# Altium PCB Power Board.PcbDoc
Units mm, origin at the board's own origin, x right, y up, seen from the top; angles counter-clockwise.
Board outline 84 x 73 mm, 2 copper layers (Top Layer, Bottom Layer); 21 components, 10 nets, 48 pads, 0 vias.
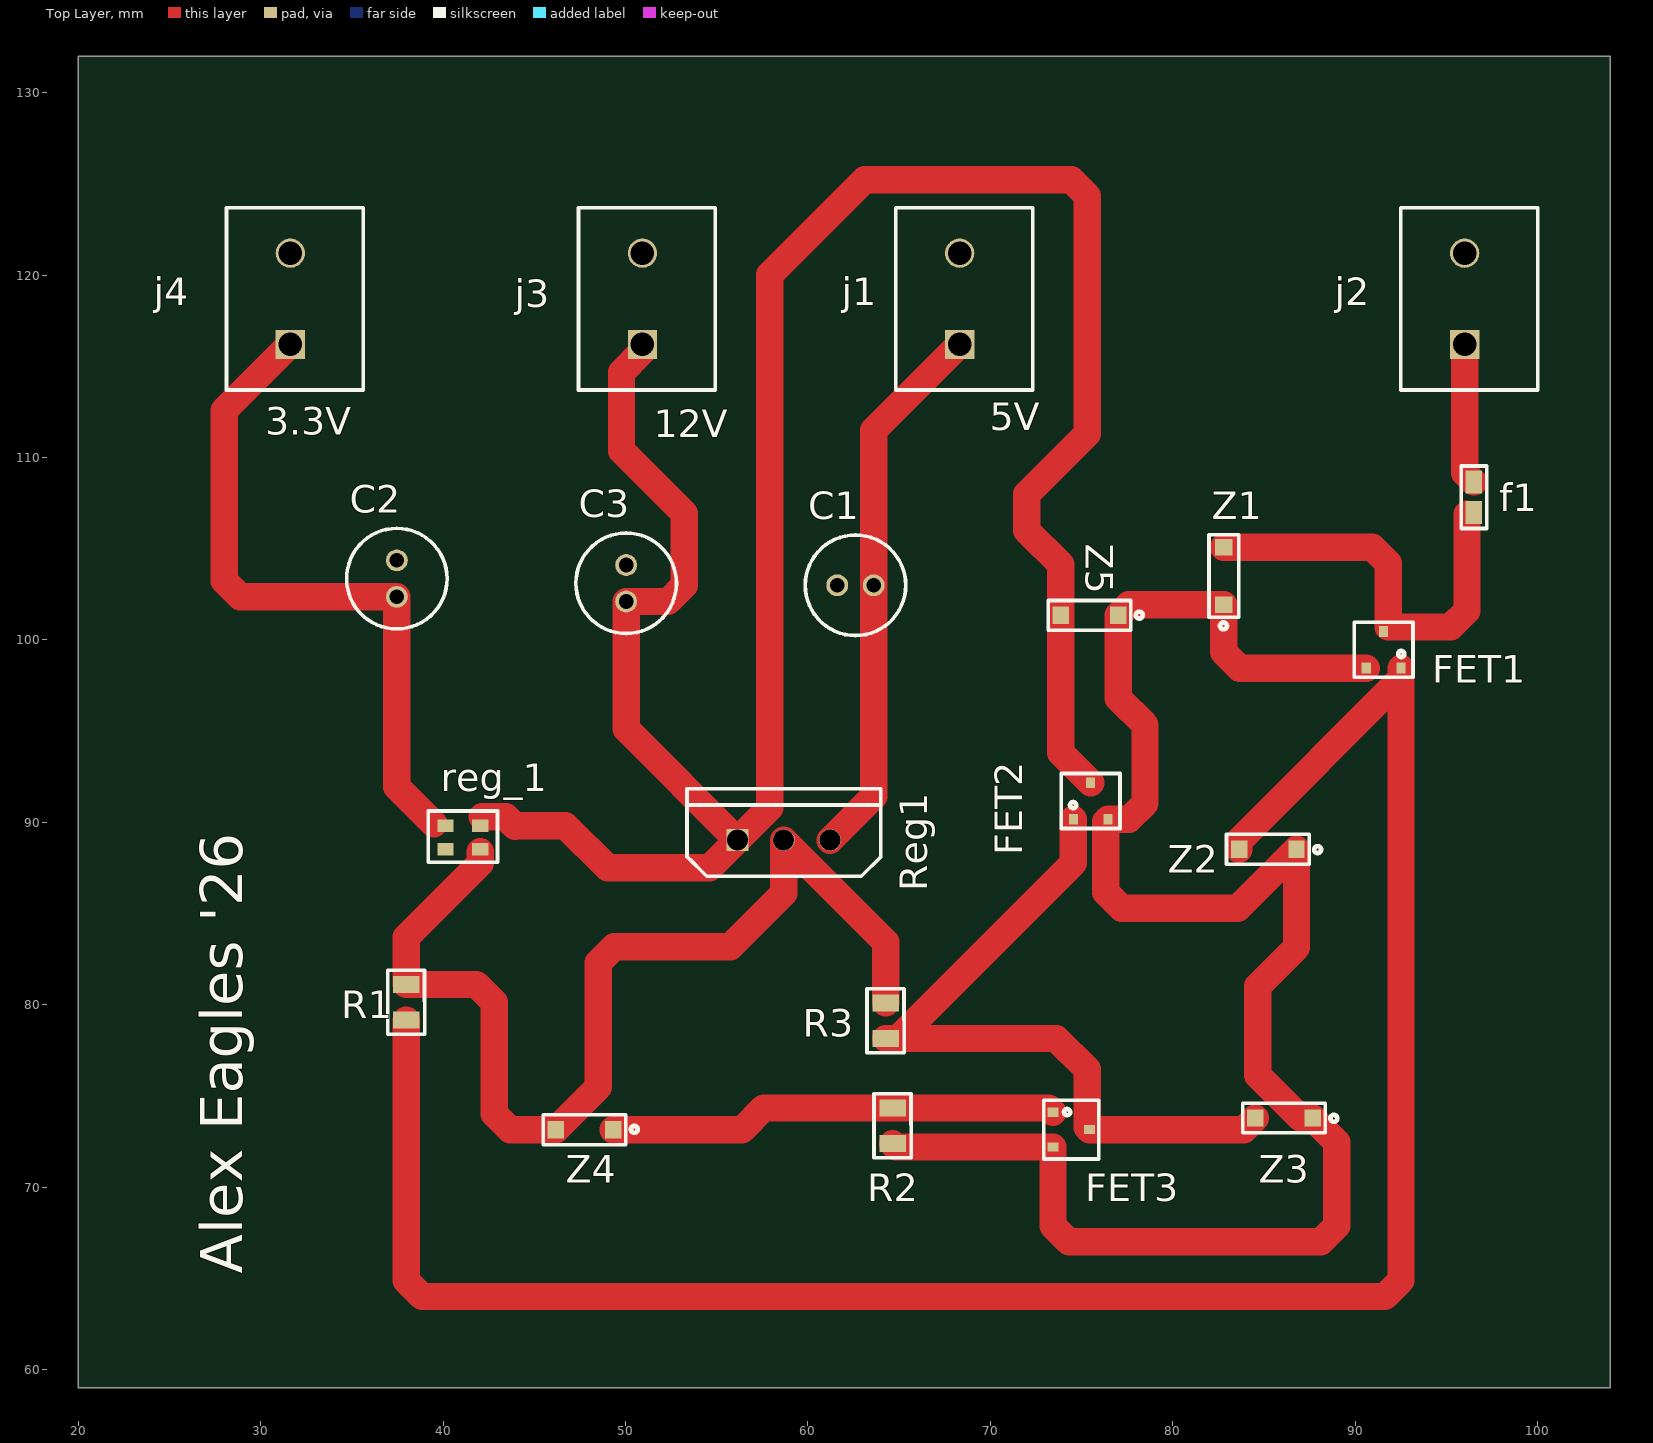
[diagram p0: Top Layer view]
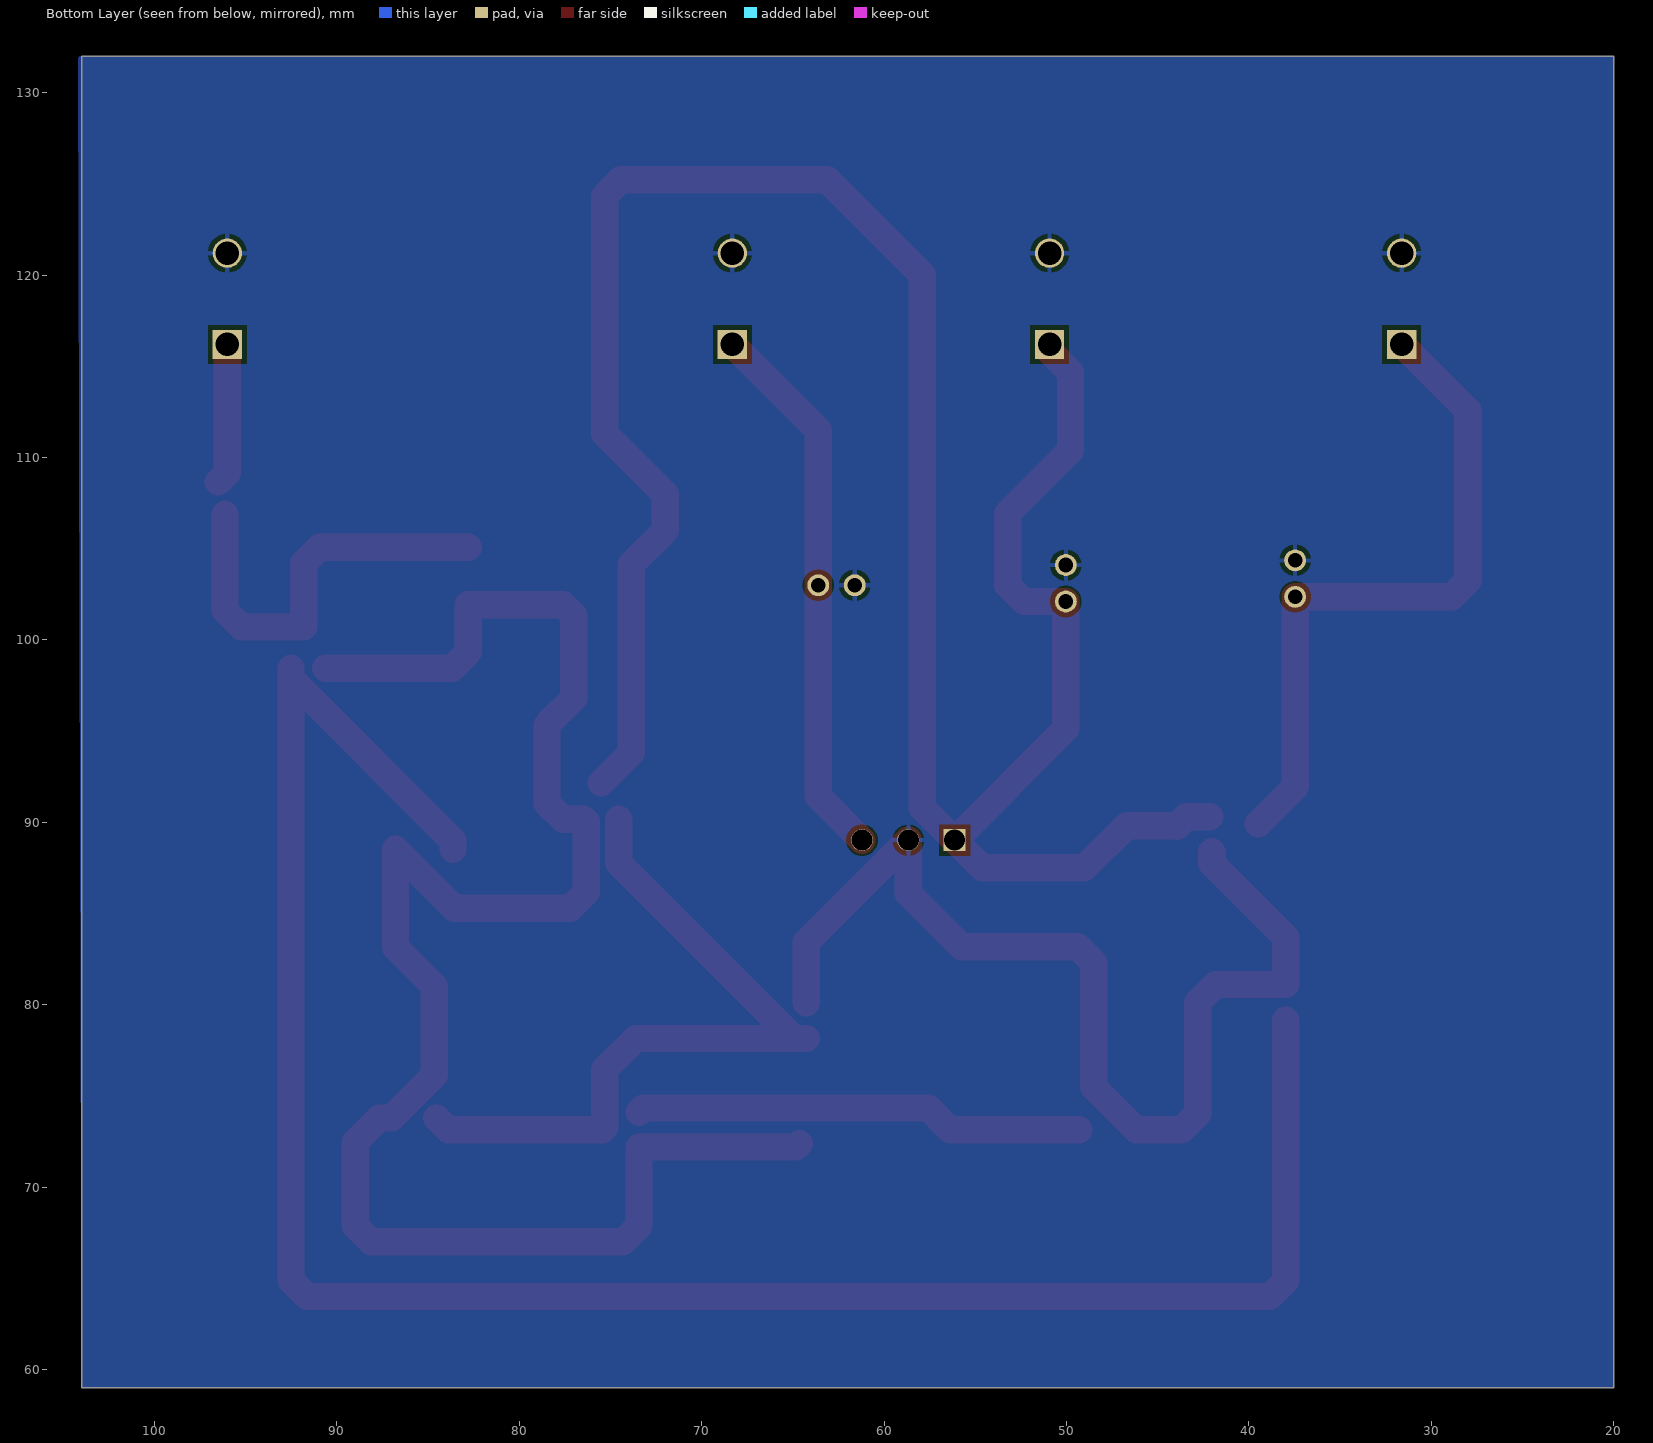
[diagram p1: Bottom Layer view, seen from below]
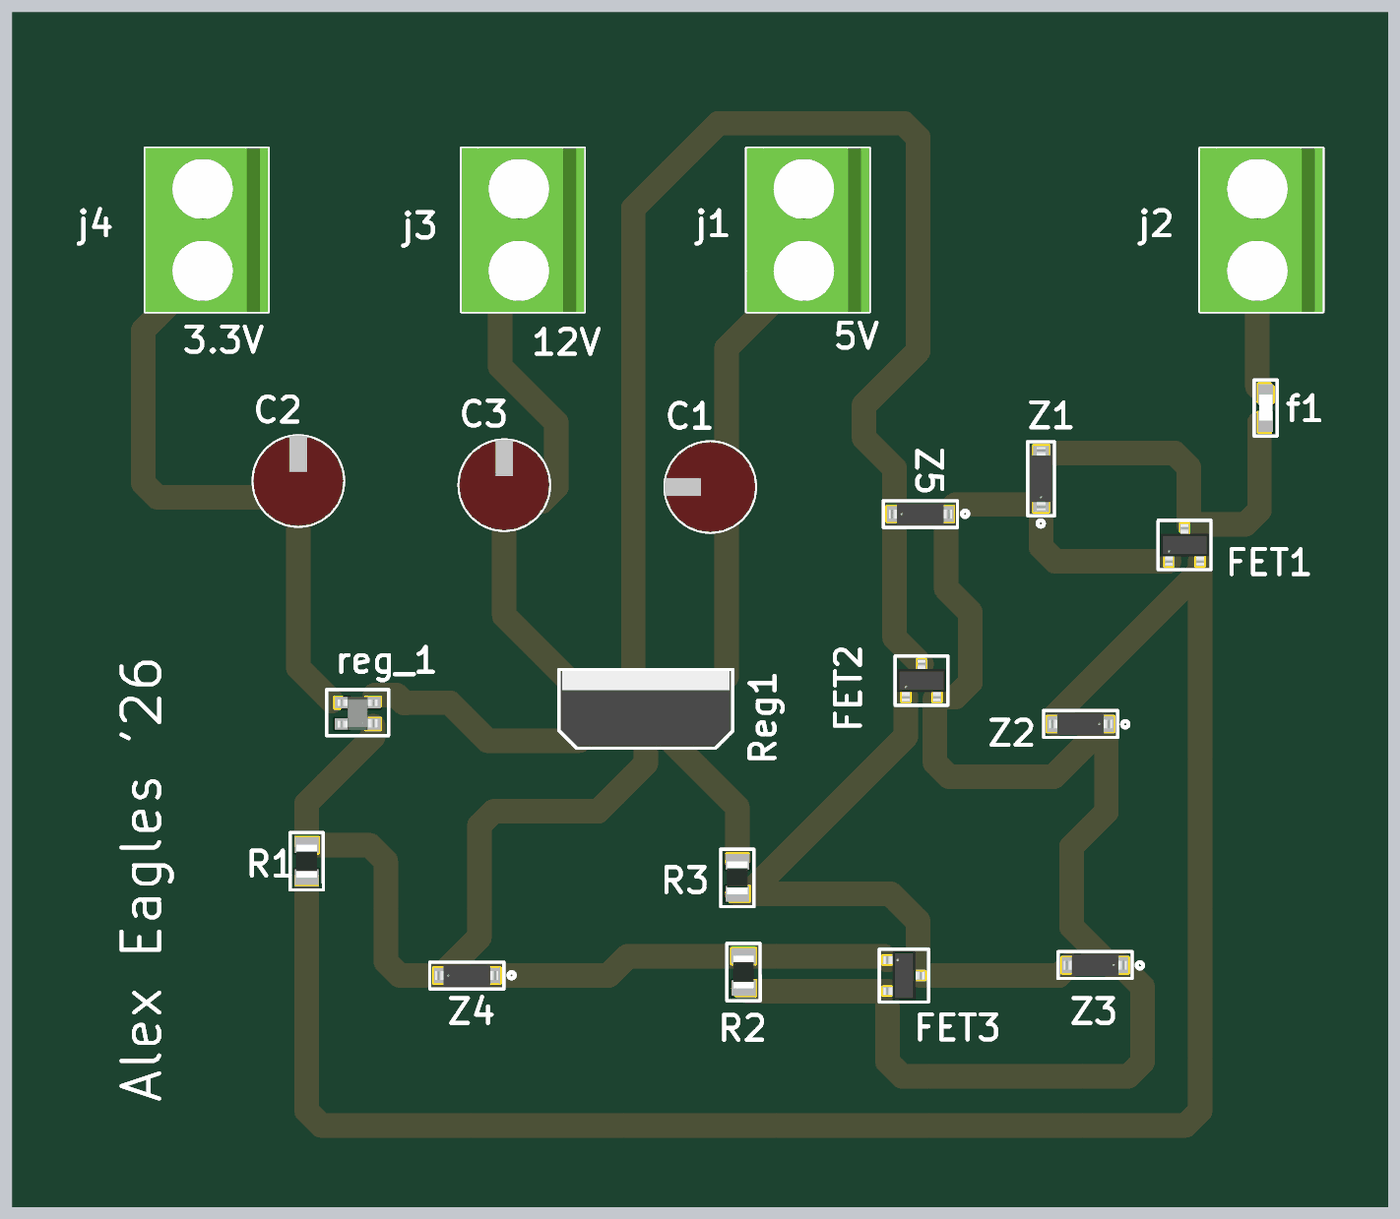
[diagram p2: 3D render of the assembled board from above, using the file's embedded part models]

## Layer stack, top to bottom
Top Solder: solder mask 0.0102, Solder Resist, Dk 3.5
Top Layer: signal copper 0.0356
Dielectric 1: dielectric 0.32, FR-4, Dk 4.8
Bottom Layer: signal copper 0.0356
Bottom Solder: solder mask 0.0102, Solder Resist, Dk 3.5

## Board outline
20,132 104,132 104,59 20,59

## Design rules (kind name [scope] priority, off if disabled: settings)
Clearance Clearance_1 [All] p1: gap=0.254 ignorepadtopadclearanceinfootprint=FALSE except(0: Arc-Hole Track-Hole SMDPad-Hole THPad-Hole Via-Hole Fill-Hole Poly-Hole Region-Hole Text-Hole)
Clearance [All] p2: gap=0.254 ignorepadtopadclearanceinfootprint=FALSE except(0: Arc-Hole Track-Hole SMDPad-Hole THPad-Hole Via-Hole Fill-Hole Poly-Hole Region-Hole Text-Hole)
PolygonConnect [All] p1: connectstyle=Relief reliefconductorwidth=0.254 reliefentries=4 polygonreliefangle="90 Angle" airgapwidth=0.254
RoutingVias [All] p1: holewidth=0.711 width=1.27 viastyle="Through Hole" minholewidth=0.711 minwidth=1.27 maxholewidth=0.711 maxwidth=1.27
SolderMaskExpansion [All] p1: expansion=0.102 istentingtop=FALSE
Width [All] p1: maxlimit=1.5 minlimit=1.5 preferedwidth=1.5 minimp=50.000000 maximp=50.000000 favimp=50.000000
30 further rules are at their usual default settings.

## Components (designator, comment, footprint, x,y, rotation, side; value= is the part's Value field where it differs from the comment)
C1 "1uf" Capacitor 62.611,102.997 r180 top
C2 "1uf" Capacitor 37.465,103.362 r90 top
C3 "1uf" Capacitor 50.038,103.108 r90 top
f1 "fuse" Fuse 96.52,107.823 r90 top
FET1 "P MOSFET" P-MOSFET#1 91.567,98.457 r0 top (schematic designator P_FET1)
FET2 "P MOSFET" P-MOSFET#2 75.504,90.17 r180 top (schematic designator P_FET2)
FET3 "P MOSFET" P-MOSFET#2 73.438,73.152 r90 top (schematic designator P_FET3)
j1 "terminal" TERMINAL 68.326,116.205 r90 top
j2 "terminal" TERMINAL 96.012,116.205 r90 top
j3 "terminal" TERMINAL 50.927,116.205 r90 top
j4 "terminal" TERMINAL 31.623,116.205 r90 top
R1 "360r" R0805 37.973,80.137 r90 top value=360R
R2 "360r" R0805 64.643,73.365 r90 top value=360R
R3 "360r" R0805 64.262,79.121 r90 top value=360R
Reg1 "7805" 7805 58.674,89.027 r0 top
reg_1 "regulator" reg_3V3 41.082,89.169 r90 top
Z1 "zener" zeber 82.804,103.505 r270 top
Z2 "zener" zeber 85.217,88.519 r0 top
Z3 "zener" zeber 86.106,73.787 r0 top
Z4 "zener" zeber 47.752,73.152 r0 top
Z5 "zener" zeber 75.438,101.346 r0 top

## Footprints (in the part's own frame and the unit in brackets; to place one, negate y for a bottom-side part, rotate by r counter-clockwise, add the part's x,y. Pads: shape width x height; smd on the part's side, far side on the other; paste and mask are expansions set on the pad)
7805 [mm]
  rect 1.2x1.2 hole 1.15: 1(-2.54,0)
  round 1.2 hole 1.15: 2(0,0) 3(2.54,0)
  silkscreen extent -5.3,-1.98 5.32,2.82, body extent -5.2,-1.88 5.22,2.72, height 19.71
Capacitor [mm]
  round 1.2 hole 0.8: 1(-1,0) 2(1,0)
  silkscreen extent -2.76,-2.76 2.76,2.76, body extent -2.76,-2.75 2.79,2.75, height 12.51
Fuse [mm]
  rect 1.27x0.91 smd: 1(-0.835,0) 2(0.835,0)
  silkscreen extent -1.71,-0.71 1.71,0.71, body extent -0.77,-0.41 0.83,0.41, height 0.6
P-MOSFET#1 [mm]
  rect 0.5x0.6 smd: 1(0.95,0) 2(-0.95,0) 3(0,2)
  silkscreen extent -1.61,-0.51 1.61,2.51, body extent -1.5,-0.24 1.5,2.24, height 1.09
P-MOSFET#2 [mm]
  rect 0.5x0.6 smd: 1(0.95,0) 2(-0.95,0) 3(0,-2)
  silkscreen extent -1.61,-2.51 1.61,0.51, body extent -1.5,-2.24 1.5,0.24, height 1.09
R0805 [mm]
  rect 0.95x1.45 smd: 1(-0.975,0) 2(0.975,0)
  silkscreen extent -1.75,-1.02 1.75,1.02, body extent -1,-0.63 1,0.63, height 0.6
reg_3V3 [mm]
  rect 0.7x0.9 smd: 1(-0.65,-0.95) 2(0.65,-0.95) 3(0.65,0.95) 4(-0.65,0.95)
  silkscreen extent -1.36,-1.9 1.45,1.9, body extent -1,-1.21 1,1.21, height 1.09
TERMINAL [mm]
  rect 1.6x1.6 hole 1.3: 1(0,0)
  round 1.6 hole 1.3: 2(5,0)
  silkscreen extent -2.5,-4 7.5,3.5, body extent -2.5,-4 7.5,3.5, height 11.5
zeber [mm]
  rect 0.9x0.95 smd: A(-1.575,0) K(1.575,0)
  silkscreen extent -2.26,-0.81 2.92,0.82, body extent -1.92,-0.67 1.92,0.67, height 0.81

## Part data
C1 C2 C3: library part capacitor, "Aluminum Electrolytic Capacitor, Aluminum (wet)", Capacitor Type=Aluminium, Manufacturer="Wurth Electronics", Manufacturer Part Number=860020672005, Supplier Part Number=732-8851-1-ND, Category="Aluminum Electrolytic Capacitors", ComponentLink1Description=https://datasheet.ciiva.com:443/pdfs/VipMasterIC/IC/MIDC/MIDC-S-A0000764616/MIDC-S-A0000764162-1.pdf?src-supplier=IHS+Markit, ComponentLink1URL=https://datasheet.ciiva.com:443/pdfs/VipMasterIC/IC/MIDC/MIDC-S-A0000764616/MIDC-S-A0000764162-1.pdf?src-supplier=IHS+Markit, ComponentLink2Description=http://www.farnell.com/datasheets/1879647.pdf?src-supplier=Farnell, ComponentLink2URL=http://www.farnell.com/datasheets/1879647.pdf?src-supplier=Farnell, ComponentLink3Description=http://katalog.we-online.de/pbs/datasheet/860020672005.pdf?src-supplier=Digikey, ComponentLink3URL=http://katalog.we-online.de/pbs/datasheet/860020672005.pdf?src-supplier=Digikey, ComponentLink4Description=https://katalog.we-online.de/pbs/datasheet/860020672005.pdf?src-supplier=Digikey, ComponentLink4URL=https://katalog.we-online.de/pbs/datasheet/860020672005.pdf?src-supplier=Digikey, ComponentLink5Description=http://www.farnell.com/datasheets/1879647.pdf?src-supplier=Element14, ComponentLink5URL=http://www.farnell.com/datasheets/1879647.pdf?src-supplier=Element14, Dielectric Material=Aluminium, Pins=2, Pricing="1=0.1, 50=0.089, 100=0.078, 250=0.069, 500=0.06, 1000=0.058 (USD)", Reach SVHC Compliant=Yes, RoHS=Yes, RoHS Compliant=Yes, Stock=10459, Supplier=Digikey
f1: library part Fuse, "Electric Fuse, Fast Blow, 1A, 32VAC, 63VDC, 35A (IR), Surface Mount, 0603", Manufacturer=Bel, Manufacturer Part Number=0686F1000-01, Supplier Part Number=507-2147-1-ND, Category=Fuses, ComponentLink1Description=https://belfuse.com/resources/C2F%200686F%20Apr%202017.pdf?src-supplier=Digikey, ComponentLink1URL=https://belfuse.com/resources/C2F%200686F%20Apr%202017.pdf?src-supplier=Digikey, Pricing="1=0.25, 5=0.206, 10=0.19, 50=0.1582, 100=0.1462, 250=0.13176, 500=0.12174, 1000=0.11246 (USD)", RoHS=Yes, Stock=87373, Supplier=Digikey
FET1 FET2 FET3: library part P_MOSFET, "Trans MOSFET P-CH 50V 0.18A Automotive AEC-Q101 3-Pin SOT-23 T/R", Drain to Source Resistance=4.5R, Manufacturer=Nexperia, Manufacturer Part Number=BSS84AK,215, Supplier Part Number=2027648, Category=MOSFETs, ComponentLink1Description=http://www.farnell.com/datasheets/1443354.pdf?src-supplier=Farnell, ComponentLink1URL=http://www.farnell.com/datasheets/1443354.pdf?src-supplier=Farnell, ComponentLink2Description=https://assets.nexperia.com/documents/data-sheet/BSS84AK.pdf?src-supplier=Digikey, ComponentLink2URL=https://assets.nexperia.com/documents/data-sheet/BSS84AK.pdf?src-supplier=Digikey, Packaging=10Packaging, Pins=3NUMBER, Pricing="3000=0.019, 9000=0.0184, 30000=0.0176, 60000=0.0173, 120000=0.0165 (USD)", RoHS=Yes, RoHS Compliant=Yes, Stock=738000, Supplier="Future Electronics"
j1 j2 j3 j4: "Barrier Strip Terminal Block", Manufacturer="Wurth Electronics", Manufacturer Part Number=691137710002, Supplier Part Number=1769908, Category="Terminal Blocks", ComponentLink1Description=https://datasheet.ciiva.com:443/pdfs/VipMasterIC/IC/MIDC/MIDC-S-A0005074262/MIDC-S-A0004711666-1.pdf?src-supplier=IHS+Markit, ComponentLink1URL=https://datasheet.ciiva.com:443/pdfs/VipMasterIC/IC/MIDC/MIDC-S-A0005074262/MIDC-S-A0004711666-1.pdf?src-supplier=IHS+Markit, ComponentLink2Description=https://katalog.we-online.de/em/datasheet/691137710002.pdf?src-supplier=Digikey, ComponentLink2URL=https://katalog.we-online.de/em/datasheet/691137710002.pdf?src-supplier=Digikey, Pricing="500=0.218, 1000=0.202, 2500=0.189 (GBP)", RoHS=No, RoHS Compliant=Yes, Stock=355, Supplier=Rs
R1 R2 R3: library part resistor, "Fixed Resistor, Metal Glaze/thick Film, 0.125W, 360ohm, 150V, 1% +/-Tol, 100ppm/Cel, Surface Mount, 0805", Case/Package=0805, Manufacturer=Vishay, Manufacturer Part Number=CRCW0805360RFKEA, Max Operating Temperature=155°C, Min Operating Temperature=-55°C, Package Height=0.45mm, Package Length=2mm, Package Shape=Rectangular, Package Style=SMTMeter, Package Width=1.25mm, Power=125mW, Rated Temperature=70°C, Resistor Type="FIXED RESISTOR", Supplier Part Number=71-CRCW0805360RFKEA, Temperature Coefficient=100ppm/°C, Tolerance=1%, Working Voltage=150V, Category="Chip SMD Resistors", ComponentLink1Description=https://datasheet.ciiva.com:443/pdfs/VipMasterIC/IC/VISH/VISH-S-A0007266705/VISH-S-A0007266705-1.pdf?src-supplier=IHS+Markit, ComponentLink1URL=https://datasheet.ciiva.com:443/pdfs/VipMasterIC/IC/VISH/VISH-S-A0007266705/VISH-S-A0007266705-1.pdf?src-supplier=IHS+Markit, ComponentLink2Description=https://datasheet.ciiva.com/2467/dcrcwe3-2467773.pdf?src-supplier=Digikey, ComponentLink2URL=https://datasheet.ciiva.com/2467/dcrcwe3-2467773.pdf?src-supplier=Digikey, Construction=Chip, JESD-609 Code=e3, Mounting Technology="Surface Mount", Packaging="Tape and Reel", Pins=2, Pricing="1=0.1, 10=0.025, 50=0.025, 100=0.015, 1000=0.012, 10000=0.008 (USD)", Reach SVHC Compliant=Yes, Reference Standard=AEC-Q200, RoHS=Yes, RoHS Compliant=Yes, Stock=921, Supplier=Mouser, Technology="METAL GLAZE/THICK FILM", Terminal Finish=Nickel, Termination=Wraparound
Reg1: "Fixed Positive Standard Regulator, 5VBIPolar, PSFM3", Manufacturer=STMicroelectronics, Manufacturer Part Number=L7805C-V, Max Supply Voltage=25V, Min Input Voltage=7V, Operating Temperature, TJ-Max=125°C, Operating Temperature, TJ-Min=0°C, Output Current1-Max=1.5A, Output Voltage1-Max=5.25V, Output Voltage1-Min=4.75V, Output Voltage1-Nom=5V, Package Shape=Rectangular, Package Style="FLANGE MOUNTMeter", Supplier Part Number=4561296, Category="Voltage Regulators - Linear", Channels=1, ComponentLink1Description=https://datasheet.ciiva.com:443/pdfs/VipMasterIC/IC/SGST/SGST-S-A0006334694/SGST-S-A0006334694-1.pdf?src-supplier=IHS+Markit, ComponentLink1URL=https://datasheet.ciiva.com:443/pdfs/VipMasterIC/IC/SGST/SGST-S-A0006334694/SGST-S-A0006334694-1.pdf?src-supplier=IHS+Markit, ComponentLink2Description=https://datasheet.ciiva.com/15111/getdatasheetpartid-44136-15111027.pdf?src-supplier=Verical, ComponentLink2URL=https://datasheet.ciiva.com/15111/getdatasheetpartid-44136-15111027.pdf?src-supplier=Verical, ComponentLink3Description=https://datasheet.ciiva.com/19480/924633-19480531.pdf?src-supplier=Jameco, ComponentLink3URL=https://datasheet.ciiva.com/19480/924633-19480531.pdf?src-supplier=Jameco, ComponentLink4Description=https://datasheet.ciiva.com/29156/156048-da-01-en-spannungsregler-l-7805-cv-to220-stm-29156924.pdf?src-supplier=Conrad, ComponentLink4URL=https://datasheet.ciiva.com/29156/156048-da-01-en-spannungsregler-l-7805-cv-to220-stm-29156924.pdf?src-supplier=Conrad, ComponentLink5Description=https://datasheet.ciiva.com/2043/cd00000444-2043986.pdf?src-supplier=Digikey, ComponentLink5URL=https://datasheet.ciiva.com/2043/cd00000444-2043986.pdf?src-supplier=Digikey, ComponentLink6Description=https://datasheet.ciiva.com/1512/1805459-1512333.pdf?src-supplier=Element14, ComponentLink6URL=https://datasheet.ciiva.com/1512/1805459-1512333.pdf?src-supplier=Element14, ComponentLink7Description=https://datasheet.ciiva.com/14149/tel78xx-l78xxc-e-14149770.pdf?src-supplier=Distrelec, ComponentLink7URL=https://datasheet.ciiva.com/14149/tel78xx-l78xxc-e-14149770.pdf?src-supplier=Distrelec, ComponentLink8Description=https://datasheet.ciiva.com/6884/1805459-6884463.pdf?src-supplier=Newark, ComponentLink8URL=https://datasheet.ciiva.com/6884/1805459-6884463.pdf?src-supplier=Newark, ComponentLink9Description=https://datasheet.ciiva.com/2073/cd00000444-2073087.pdf?src-supplier=Digikey, ComponentLink9URL=https://datasheet.ciiva.com/2073/cd00000444-2073087.pdf?src-supplier=Digikey, ComponentLink10Description=https://datasheet.ciiva.com/16458/cd00000444-16458159.pdf?src-supplier=Future+Electronics, ComponentLink10URL=https://datasheet.ciiva.com/16458/cd00000444-16458159.pdf?src-supplier=Future+Electronics, ComponentLink11Description=https://datasheet.ciiva.com/1511/1805459-1511914.pdf?src-supplier=Element14, ComponentLink11URL=https://datasheet.ciiva.com/1511/1805459-1511914.pdf?src-supplier=Element14, ComponentLink12Description=https://datasheet.ciiva.com/1511/1805459-1511915.pdf?src-supplier=Element14, ComponentLink12URL=https://datasheet.ciiva.com/1511/1805459-1511915.pdf?src-supplier=Element14, JESD-609 Code=e3, Pins=3, Pricing="50=0.137, 750=0.13, 2500=0.126, 7500=0.123, 25000=0.115 (USD)", Qualification Status="Not Qualified", Reach SVHC Compliant=No, Regulator Type="FIXED POSITIVE SINGLE OUTPUT STANDARD REGULATOR", RoHS=Yes, RoHS Compliant=Yes, Stock=420050, Supplier="Future Electronics", Surface Mount=No, Technology=BIPOLAR, Terminal Finish=Tin, Terminal Form="Through Hole", Terminal Position=SINGLE
reg_1: library part 12v-3.3v, "Fixed Positive LDO Regulator, 3.3V, 1V Dropout, CMOS, PDSO4", Case/Package=TSOP, Dropout Voltage1-Max=1V, Dropout Voltage1-Nom=650mV, Input Voltage Absolute-Max=12V, Manufacturer="ON Semiconductor", Manufacturer Part Number=NCP553SQ33T1G, Max Operating Temperature=85°C, Min Input Voltage=4.3V, Min Operating Temperature=-40°C, Operating Temperature, TJ-Max=125°C, Output Current1-Max=80mA, Output Voltage1-Max=3.399V, Output Voltage1-Min=3.201V, Output Voltage1-Nom=3.3V, Package Body Material=Plastic, Package Equivalence Code=SOT-343R, Package Shape=Rectangular, Package Style="SMALL OUTLINE, THIN PROFILEMeter", Peak Reflow Temperature (Cel)=260°C, Supplier Part Number=NCP553SQ33T1GOSCT-ND, Time @ Peak Reflow Temperature-Max (s)=40s, Voltage Tolerance-Max=3%, Adjustability=FIXED, Category="Voltage Regulators - Linear", Channels=1, ComponentLink1Description=https://datasheet.ciiva.com:443/pdfs/VipMasterIC/IC/ONSM/ONSM-S-A0003590534/ONSM-S-A0002812272-1.pdf?src-supplier=IHS+Markit, ComponentLink1URL=https://datasheet.ciiva.com:443/pdfs/VipMasterIC/IC/ONSM/ONSM-S-A0003590534/ONSM-S-A0002812272-1.pdf?src-supplier=IHS+Markit, ComponentLink2Description=https://datasheet.ciiva.com/16468/ncp552-d-16468774.pdf?src-supplier=Future+Electronics, ComponentLink2URL=https://datasheet.ciiva.com/16468/ncp552-d-16468774.pdf?src-supplier=Future+Electronics, ComponentLink3Description=https://datasheet.ciiva.com/8231/ncp553-d-8231626.pdf?src-supplier=Avnet, ComponentLink3URL=https://datasheet.ciiva.com/8231/ncp553-d-8231626.pdf?src-supplier=Avnet, ComponentLink4Description=https://datasheet.ciiva.com/6581/ncp553-d-6581414.pdf?src-supplier=Digikey, ComponentLink4URL=https://datasheet.ciiva.com/6581/ncp553-d-6581414.pdf?src-supplier=Digikey, Height - Seated (Max)=1.1mm, JESD-30 Code=R-PDSO-G4, JESD-609 Code=e3, Length=2mm, Line Regulation-Max=0.0347%, Load Regulation-Max=0.0632%, Max Supply Voltage=12V, Moisture Sensitivity Level=1, Number of Outputs=1, Packaging="Tape and Reel", Pins=4, Pricing="1=0.63, 10=0.555, 25=0.5216, 100=0.3954, 250=0.33652, 500=0.3197, 1000=0.24399 (USD)", Qualification Status="Not Qualified", Reach SVHC Compliant=Yes, Regulator Type="FIXED POSITIVE SINGLE OUTPUT LDO REGULATOR", RoHS=Yes, RoHS Compliant=Yes, Stock=9110, Supplier=Digikey, Surface Mount=Yes, Technology=CMOS, Terminal Finish=Tin, Terminal Form="Gull Wing", Terminal Pitch=1.3mm, Terminal Position=DUAL, Width=1.25mm
Z1 Z2 Z3 Z4 Z5: library part "zener diode", "Zener Diode, 12V V(Z), 5.39%, 0.37W, Silicon, Unidirectional", Manufacturer=Diodes, Manufacturer Part Number=BZT52C12-13-F, Supplier Part Number=BZT52C1213-FDICT-ND, Category="Zener Diodes", ComponentLink1Description=https://datasheet.ciiva.com:443/pdfs/VipMasterIC/IC/DIOD/DIODS15473/DIODS15473-1.pdf?src-supplier=IHS+Markit, ComponentLink1URL=https://datasheet.ciiva.com:443/pdfs/VipMasterIC/IC/DIOD/DIODS15473/DIODS15473-1.pdf?src-supplier=IHS+Markit, ComponentLink2Description=http://www.farnell.com/datasheets/2704937.pdf?src-supplier=Farnell, ComponentLink2URL=http://www.farnell.com/datasheets/2704937.pdf?src-supplier=Farnell, ComponentLink3Description=http://components.arrow.com/part/dataview/43501861S426489N2867?src-supplier=Arrow+Electronics, ComponentLink3URL=http://components.arrow.com/part/dataview/43501861S426489N2867?src-supplier=Arrow+Electronics, ComponentLink4Description=https://www.diodes.com/assets/Datasheets/ds18004.pdf?src-supplier=Digikey, ComponentLink4URL=https://www.diodes.com/assets/Datasheets/ds18004.pdf?src-supplier=Digikey, ComponentLink5Description=http://www.diodes.com/datasheets/ds18004.pdf?src-supplier=Avnet, ComponentLink5URL=http://www.diodes.com/datasheets/ds18004.pdf?src-supplier=Avnet, ComponentLink6Description=http://www.farnell.com/datasheets/2704937.pdf?src-supplier=Newark, ComponentLink6URL=http://www.farnell.com/datasheets/2704937.pdf?src-supplier=Newark, Pricing="1=0.15, 10=0.101, 100=0.0494, 500=0.04118, 1000=0.02861, 2000=0.02479, 5000=0.023 (USD)", RoHS=No, RoHS Compliant=No, Stock=483720, Supplier=Digikey

## Nets (pads, with @x,y where several pads share a name; then routed paths per layer and width w, separated by ;. In a path a pad name is that pad's centre, name@x,y a point inside that pad or via, vN(x,y) a via of type N, cw(c..) or ccw(c..) an arc to the next point about the centre after c; other vN are vias at no path point)
GND: C1.2 C2.2 C3.2 j1.2 j2.2 j3.2 j4.2 R1.2 R3.2 Reg1.2 reg_1.1 Z4.A | length 60.1
  Top Layer w1.5: reg_1.1@42.037,88.39 42.037,87.757 37.973,83.693 R1.2 41.824,81.112 42.799,80.137 42.799,74.031 43.678,73.152 Z4.A 48.514,75.489 48.514,82.306 49.393,83.185 55.753,83.185 58.674,86.106 Reg1.2 64.262,83.439 R3.2
NetC1_1: C1.1 j1.1 Reg1.3 | length 30.1
  Top Layer w1.5: Reg1.3 63.611,91.424 C1.1 63.611,111.49 j1.1
NetC2_1: C2.1 j4.1 reg_1.3 | length 37.6
  Top Layer w1.5: j4.1 28,112.582 28,103.241 28.879,102.362 C2.1 37.465,91.948 39.497,89.916
NetC3_1: C3.1 FET2.3 j3.1 Reg1.1 reg_1.2 Z5.A | length 136.7
  Top Layer w1.5: 42.148,90.297 43.434,90.297 43.942,89.789 43.972,89.819 46.706,89.819 49.022,87.503 54.61,87.503 Reg1.1 ; j3.1 50.877,116.155 50.877,115.774 49.784,114.681 49.784,110.363 53.213,106.934 53.213,102.987 52.334,102.108 C3.1 50.038,95.123 Reg1.1 ; FET2.3 73.863,93.811 Z5.A 73.863,104.137 72,106 72,108 75.311,111.311 75.311,124.343 74.432,125.222 63.119,125.222 57.912,120.015 57.912,90.805 Reg1.1
Netf1_1: f1.1 FET1.3 Z1.A | length 22.9
  Top Layer w1.5: Z1.A 90.942,105.08 91.821,104.201 91.821,100.711 95.26,100.711 96.139,101.59 f1.1@96.139,106.904
Netf1_2: f1.2 j2.1 | length 7.8
  Top Layer w1.5: j2.1 96.012,109.166 f1.2
NetP_FET1_1: FET1.1 R1.1 Z2.A | length 116.7
  Top Layer w1.5: R1.1 37.973,64.879 38.852,64 91.638,64 92.517,64.879 FET1.1 92.517,97.876 83.642,89.001 Z2.A
NetP_FET1_2: FET1.2 FET2.2 FET3.2 R2.1 Z1.K Z2.K Z3.K Z5.K | length 99.5
  Top Layer w1.5: R2.1 64.831,72.202 FET3.2 73.438,67.879 74.317,67 88.121,67 89,67.879 89,72.468 Z3.K 87.012,73.787 84.668,76.131 84.668,81.026 86.792,83.15 Z2.K 83.566,85.293 77.206,85.293 76.327,86.172 76.327,90.043 FET2.2 77.607,90.17 78.486,91.049 78.486,95.339 77.013,96.812 Z5.K 77.597,101.93 Z1.K 82.804,101.346 82.804,99.336 83.683,98.457 FET1.2
NetP_FET2_1: FET2.1 FET3.3 R3.1 Z3.A | length 40.5
  Top Layer w1.5: R3.1 R3.1@64.932,78.146 ; FET2.1 74.554,87.768 R3.1@64.932,78.146 ; Z3.A 83.896,73.152 FET3.3 75.311,73.279 75.311,76.454 73.619,78.146 R3.1@64.932,78.146
NetP_FET3_1: FET3.1 R2.2 Z4.K | length 24.7
  Top Layer w1.5: Z4.K 56.391,73.152 57.579,74.34 R2.2 73.2,74.34 FET3.1
pads on no net: reg_1.4

## Polygon pours and split planes (outlines as drawn)
GND on Bottom Layer "GND_L02_P000" (solid, pour order 0): 104.183,132 20,132 20,59 104,59

## Silkscreen, mask and mechanical layers (free items; w line width, h text height)
Top Overlay:
  text "5V" at 69.977,111.506 h1.52
  text "3.3V" at 30.254,111.254 h1.52
  text "12V" at 51.562,111.125 h1.52
  text "Alex Eagles '26" at 28.98,65.254 h2.3 r90